# EAGLE board USB2Serial_FT232RL_v1.0 (EAGLE 9.6.2)
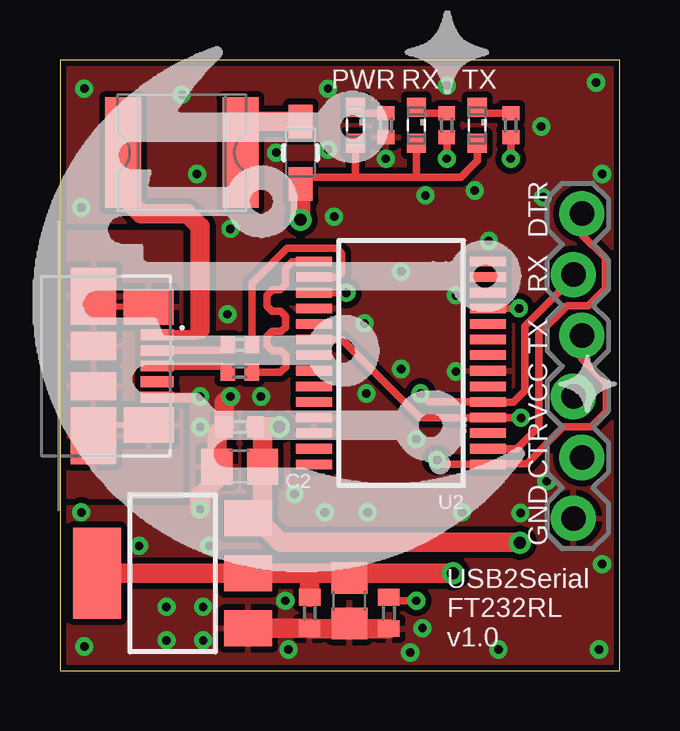
[diagram p0: board, top side]
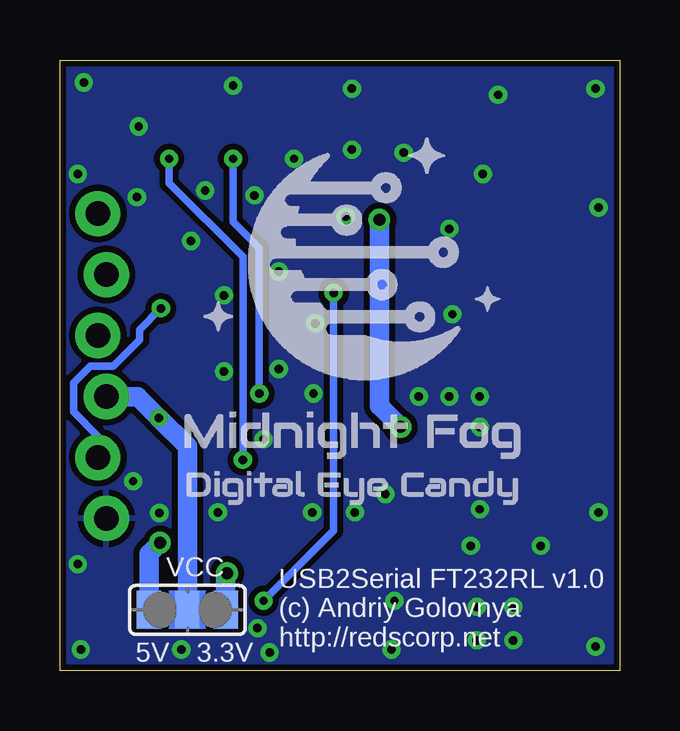
[diagram p1: board, bottom side, seen from below]

Size 23.35 x 25.45 mm. Coordinates in mm from the lower left corner, seen from the top.
Outline: 0,0 23.35,0 23.35,25.45 0,25.45 0,0
Copper layers (1*16): Top 0.035mm / dielectric 1.5mm / Bottom 0.035mm
Design rules "default *": minimum track width 6mil, minimum drill 0.35mm, track to track 6mil, track to pad 6mil, pad to pad 6mil, via to via 6mil, smd to smd 6mil, copper to edge 10mil, drill to drill 6mil, minimum pad ring 10mil, minimum via ring 8mil, stop-mask expansion 4mil, vias tented up to drill 20mil, thermal gap 10mil
Net classes: 1 XUSB: width 0.305 mm; 2 USB: width 0.305 mm; 3 POWER: width 0.305 mm

## Footprints (pad centres in the part's own frame; a part is rotated, then mirrored left to right if it is on the bottom)
C0805 = smd 1.3 x 1.5: 1 -0.95,0; 2 0.95,0
C0402 = smd 0.7 x 0.9: 1 -0.65,0; 2 0.65,0
1X06_LOCK = drill 1.016 pad 1.88: 1 0,0.178; 2 2.54,-0.178; 3 5.08,0.178; 4 7.62,-0.178; 5 10.16,0.178; 6 12.7,-0.178
MOLEX_47346-0001 = smd 0.45 x 1.38: 1 -1.3,2.66; 2 -0.65,2.66; 3 0,2.66; 4 0.65,2.66; 5 1.3,2.66 | smd 1.475 x 2.1: SH1 -2.462,2.3; SH2 2.462,2.3 | smd 2.375 x 1.9: SH3 -2.913,0; SH6 2.913,0 | smd 1.175 x 1.9: SH4 -0.838,0; SH5 0.838,0
MF-SMDF050 = smd 1.5 x 4.6: 1 -2.45,0; 2 2.45,0
SOT223 = smd 1.5 x 2: 1 -2.3,-3.15; 2 0,-3.15; 3 2.3,-3.15 | smd 3.8 x 2: 4 0,3.15
WE-CBA_0805(W=4) = smd 1.4 x 1: 1 -1.3,0; 2 1.3,0
SML0603 = smd 0.8 x 0.8: A 0.75,0; C -0.75,0
R0402 = smd 0.6 x 0.7: 1 -0.5,0; 2 0.5,0
SJ_2FI = smd 1.016 x 1.575: 1 -1.6,0; 2 0,0; 3 1.6,0
SSOP28 = smd 0.4 x 1.5: 1 -4.225,-3.625; 2 -3.575,-3.625; 3 -2.925,-3.625; 4 -2.275,-3.625; 5 -1.625,-3.625; 6 -0.975,-3.625; 7 -0.325,-3.625; 8 0.325,-3.625; 9 0.975,-3.625; 10 1.625,-3.625; 11 2.275,-3.625; 12 2.925,-3.625; 13 3.575,-3.625; 14 4.225,-3.625; 15 4.225,3.625; 16 3.575,3.625; 17 2.925,3.625; 18 2.275,3.625; 19 1.625,3.625; 20 0.975,3.625; 21 0.325,3.625; 22 -0.325,3.625; 23 -0.975,3.625; 24 -1.625,3.625; 25 -2.275,3.625; 26 -2.925,3.625; 27 -3.575,3.625; 28 -4.225,3.625

## Placement (x,y rotation side)
C2  47uF  [C0805]  7.49,8.51 180 top
C3  47uF  [C0805]  12.06,2.92 270 top
C5  100nF  [C0402]  7.49,10.16 180 top
C6  100nF  [C0402]  10.41,2.41 270 top
C7  100nF  [C0402]  13.72,2.41 90 top
CN1  UART  [1X06_LOCK]  21.59,19.05 270 top
CN2  47346-0001  [MOLEX_47346-0001]  1.4,12.7 270 top
F2  1812L050/30PR  [MF-SMDF050]  5.08,21.59 0 top
IC1  AMS1117-3.3  [SOT223]  4.7,4.06 90 top
L2  GZ2012D601TF  [WE-CBA_0805(W=4)]  10.03,21.59 270 top
LED1  GREEN  [SML0603]  12.32,22.73 270 top
LED2  BLUE  [SML0603]  14.86,22.73 270 top
LED3  BLUE  [SML0603]  17.4,22.73 270 top
LOGO1  MFDECLOGO_L_20MM  [MFDEC_L_20MM]  -6.99,2.29 0 top  (outside the outline)
LOGO2  MFDECLOGO_SQ_10MM  [MFDEC_SQ_10MM]  19.18,6.48 0 bottom
R1  22R  [R0402]  7.49,13.59 0 top
R2  22R  [R0402]  7.49,12.45 0 top
R7  1K  [R0402]  13.59,22.73 90 top
R8  1K  [R0402]  16.13,22.73 90 top
R9  1K  [R0402]  18.8,22.73 90 top
SJ1  [SJ_2FI]  18.03,2.54 0 bottom
U2  FT232RL  [SSOP28]  14.22,12.83 90 top

## Library data of the parts
C2 C3 C5-C7 = rcl; SPICEPREFIX: C
CN1 = _my_locked_connectors
CN2 = SnapEDA-Library; MANUFACTURER: Molex
F2 = fuse
IC1 = v-reg
L2 = Wurth_Automotive_WE-CBA; DATASHEET-URL: https://www.we-online.com/catalog/datasheet/782853102.pdf; IR1: 1000mA; MOUNT: SMT; PART-NUMBER: 782853102; RDC-MAX: 0.3Ohm; TYPE: High Current; ZMAX: 1000Ohm
LED1-LED3 = led
LOGO1 LOGO2 = _my_logos
R1 R2 R7-R9 = rcl; SPICEPREFIX: R
SJ1 = _my_jumpers
U2 = ftdichip; MPN: FT232RL; OC_FARNELL: 1146032; OC_NEWARK: 91K9918

## Nets
3.3V [POWER]: C3.1 C6.1 IC1.4 SJ1.3
5V [POWER]: C2.1 C5.1 IC1.3 L2.2 LED1.A LED2.A LED3.A SJ1.1
GND [POWER]: C2.2 C3.2 C5.2 C6.2 C7.1 CN1.6 CN2.5 IC1.1 R7.1 U2.7 U2.18 U2.21 U2.25 U2.26
N$4: F2.2 L2.1
N$6: C7.2 U2.17
N$7: LED1.C R7.2
N$9: LED3.C R9.2
N$10: LED2.C R8.2
UART_CTS: CN1.5 U2.11
UART_DTR: CN1.1 U2.2
UART_RX: CN1.2 R8.1 U2.5
UART_TX: CN1.3 R9.1 U2.1
USB_D_M [USB]: R1.2 U2.16
USB_D_P [USB]: R2.2 U2.15
USB_SHIELD: CN2.SH1 CN2.SH2 CN2.SH3 CN2.SH4 CN2.SH5 CN2.SH6
VCC: CN1.4 SJ1.2 U2.4 U2.20
XUSB [POWER]: CN2.1 F2.1
XUSB_D_M [XUSB]: CN2.2 R1.1
XUSB_D_P [XUSB]: CN2.3 R2.1

## Tracks (layer width: path | path; a pad name or v marks a point on that pad's centre or on a via)
3.3V  (via drill 0.5)
  Top 0.813: v16.38,4.06 12.26,4.06 C3.1 11.87,4.06 10.41,4.06 | IC1.4 10.41,4.06 | C6.1 10.41,4.06
  Bottom 0.813: v16.38,4.06 16.43,4.01 SJ1.3
5V  (via drill 0.5)
  Top 0.305: LED3.A 17.4,21.26 16.71,20.57 14.86,20.57 | L2.2 10.32,20.57 12.32,20.57 | 14.86,20.57 12.32,20.57 | LED1.A 12.32,20.57 | LED2.A 14.86,20.57
  Top 0.813: L2.2 v10.03,18.8 | v19.18,5.33 19.15,5.36 9.2,5.36 8.2,6.36 IC1.3 8.44,6.96 C2.1 8.44,9.86 C5.1 v9.14,10.16
  Bottom 0.813: v10.03,18.8 10.03,11.05 v9.14,10.16 | v19.18,5.33 19.63,4.88 SJ1.1
GND  (via drill 0.35)
  Top 0.406: CN2.5 5.75,11.4 5.84,11.3
  Top 0.813: C7.1 12.27,1.76 | 12.27,1.76 C3.2 | 12.27,1.76 C6.2 IC1.1 | v5.84,6.73 5.84,7.3 6.54,8 C2.2 6.54,9.86 C5.2 6.84,11.16 v7.11,11.43
  other vias: 5.84,11.43 5.84,10.16 13.59,21.34 20.07,22.68 11.43,18.92 11.18,21.72 9.02,21.59 5.71,20.7 5.08,24 1.02,24.26 0.89,19.3 11.18,24.26 22.35,24.51 16.13,24.38 22.61,20.7 22.48,0.89 1.02,1.02 9.53,0.89 5.97,1.27 5.97,2.67 4.45,1.27 4.45,2.67 15.11,1.78 18.29,0.89 14.61,0.76 0.89,6.6 6.22,5.21 3.3,5.21 9.78,7.37 20.29,7.9 22.61,4.45 9.4,2.92 8.38,11.43 7.11,18.41 19.2,6.58 16.51,12.47 17.3,20.02 17.88,17.91 20.14,19.74 6.99,14.86 12.7,14.48 12.78,11.56 16.76,6.6 12.83,6.6 15.24,19.81 14.22,16.64 11.05,6.6 14.86,9.65 14.22,12.57 16.51,15.65
  pour Top (isolate 0.254, rank 2): 0,0 25.15,0 25.15,25.4 0,25.4
  pour Bottom (isolate 0.254, rank 2): 0,0 23.37,0 23.37,26.54 0,26.54
N$4
  Top 0.813: L2.1 8.07,22.89 7.53,22.35 F2.2
N$6  (via drill 0.35)
  Top 0.305: v14.86,2.92 13.72,2.92 C7.2 | v11.94,15.75 U2.17
  Bottom 0.305: v14.86,2.92 11.94,5.84 v11.94,15.75
N$7
  Top 0.305: LED1.C 12.57,23.23 R7.2
N$9
  Top 0.305: LED3.C 17.65,23.23 R9.2
N$10
  Top 0.305: LED2.C 15.11,23.23 R8.2
UART_CTS  (via drill 0.35)
  Top 0.305: v19.14,15.1 U2.11
  Bottom 0.305: v19.14,15.1 20.03,14.21 20.03,13.8 21.12,12.7 22.08,12.7 22.78,12 22.78,10.79 21.77,9.77 CN1.5
UART_DTR
  Top 0.305: CN1.1 21.77,18.17 22.73,17.2 22.73,15.92 22.03,15.21 21.15,15.21 19.97,14.04 19.97,10.17 19.06,9.25 U2.2
UART_RX  (via drill 0.35)
  Top 0.305: R8.1 v16.13,21.34 | v15.04,11.55 15.39,11.2 U2.5 18.9,11.2 19.39,11.68 19.39,14.36 21.41,16.38 CN1.2
  Bottom 0.305: v15.04,11.55 15.04,17.63 16.13,18.72 v16.13,21.34
UART_TX  (via drill 0.35)
  Top 0.305: R9.1 v18.8,21.34 | v15.72,8.79 15.91,8.6 U2.1 17.87,8.62 19.46,8.62 21,10.16 22.16,10.16 22.78,10.79 22.78,11.99 21.77,13.01 CN1.3
  Bottom 0.305: v15.72,8.79 15.72,17.25 18.8,20.32 v18.8,21.34
USB_D_M
  Top 0.305: R1.2 8,16.14 9.47,17.61 11.53,17.61 11.73,17.4 11.73,16.57 11.56,16.4 U2.16
USB_D_P
  Top 0.305: R2.2 9.19,12.45 9.42,12.68 9.42,13.14 9.22,13.34 8.87,13.34 8.64,13.56 8.64,13.95 8.84,14.15 9.22,14.15 9.4,14.33 9.4,14.78 9.2,14.99 8.84,14.99 8.64,15.19 8.64,15.65 8.87,15.88 9.17,15.88 9.4,16.1 9.4,16.76 9.69,17.05 U2.15
USB_SHIELD
  Top 0.254: CN2.SH2 1.85,10.24 CN2.SH6 | CN2.SH1 1.85,15.16 CN2.SH3
  pour Top (isolate 0.254): 3.3,14.48 5.08,14.48 5.08,18.29 0,18.29 0,7.24 5.08,7.24 5.08,10.92 3.05,10.92 3.05,14.48 3.17,14.48
VCC  (via drill 0.35)
  Top 0.305: v19.23,10.54 19.23,10.55 U2.4 17.84,10.54 15.01,10.54 11.75,13.8 U2.20
  Bottom 0.813: CN1.4 20.12,11.43 v19.23,10.54 18.03,9.35 SJ1.2
XUSB
  Top 0.406: CN2.1 5.62,14 5.84,14.22
  Top 0.813: 5.84,14.22 5.84,18.5 5.3,19.05 3.39,19.05 2.63,19.81 F2.1
XUSB_D_M
  Top 0.305: CN2.2 6.75,13.35 R1.1
XUSB_D_P
  Top 0.305: CN2.3 6.74,12.7 R2.1

## Text on the board
tPlace: PWR | RX | TX | DTR | RX | TX | VCC | CTR | GND | USB2Serial / FT232RL / v1.0
bPlace: VCC | USB2Serial FT232RL v1.0 / (c) Andriy Golovnya / http://redscorp.net | 3.3V | 5V